# Altium PCB SD_Card_PCB.PcbDoc (part 2 of 2)
Units mil, origin at the board's own origin, x right, y up, seen from the top; angles counter-clockwise.
Board outline 5600 x 4000 mil, 4 copper layers (Top Layer, Plane(Gnd), Plane(Pwr), Bottom Layer), stack 23.756 mil thick; 198 components, 190 nets, 528 pads, 167 vias.
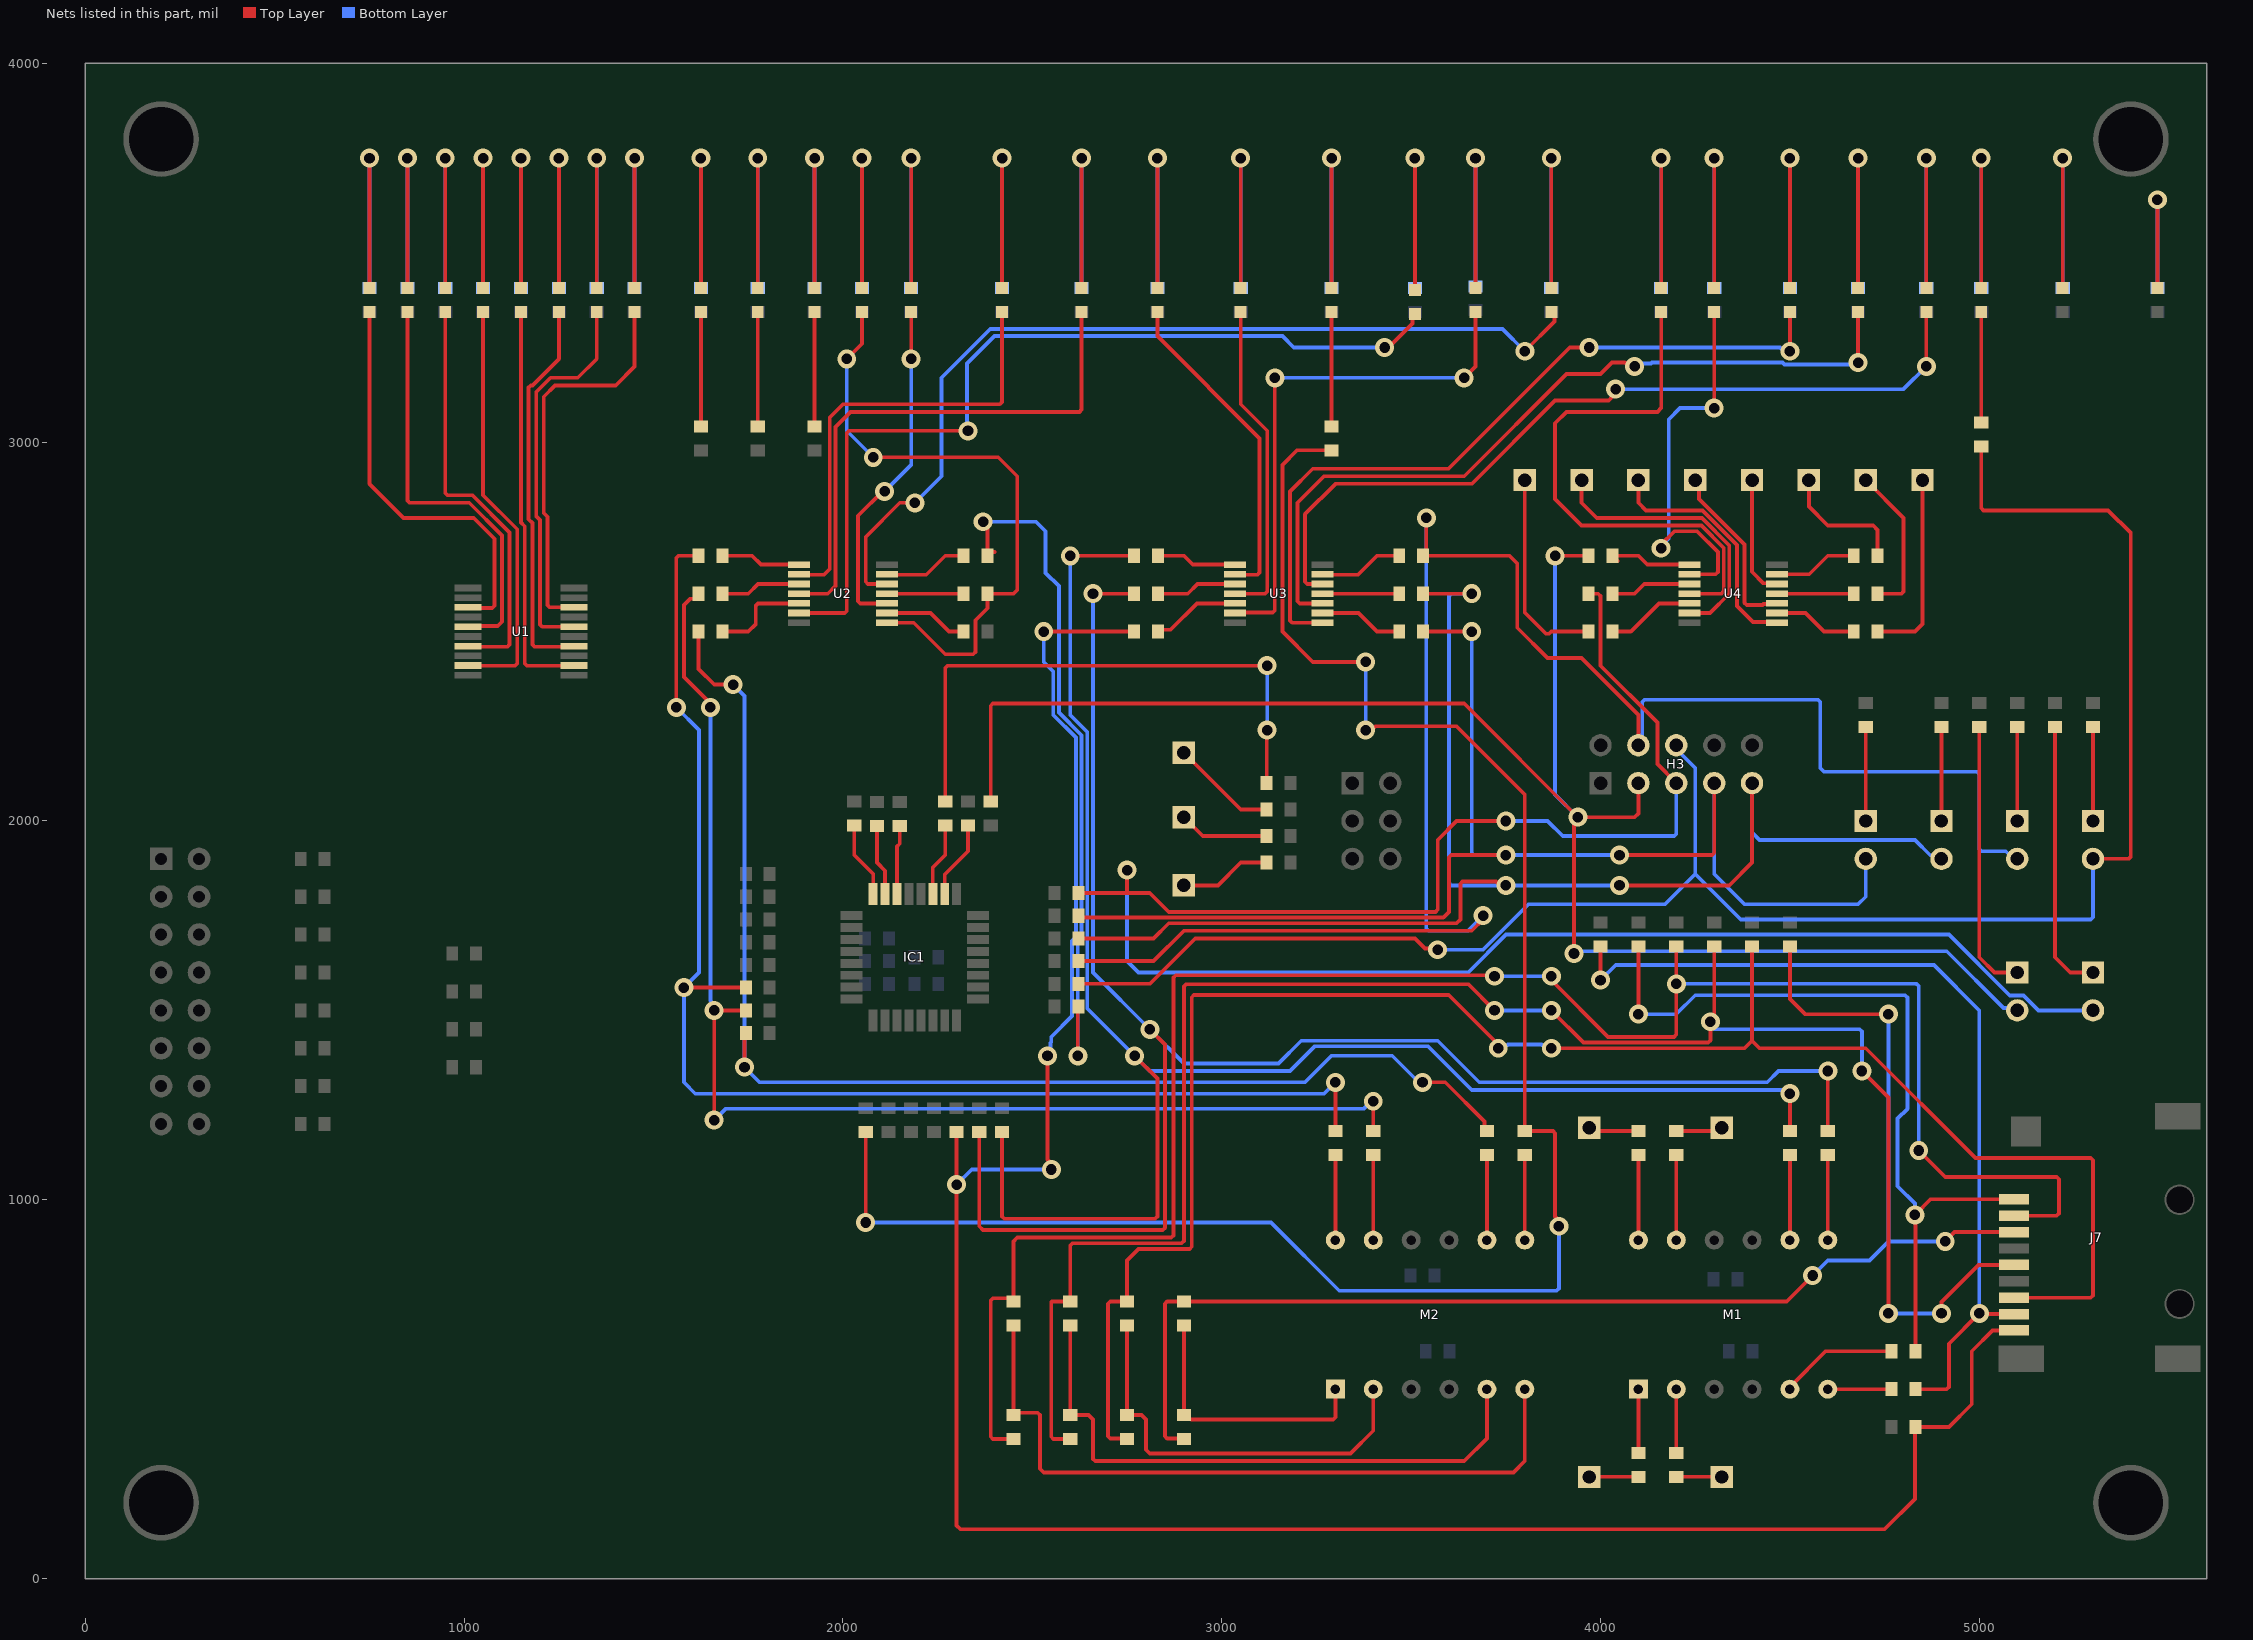
[diagram p4: the nets of this part, all layers, seen from the top]

## Via types
v1: diameter 50, hole 28, Top Layer to Bottom Layer, 167 vias

## Nets (pads, with @x,y where several pads share a name; then routed paths per layer and width w, separated by ;. In a path a pad name is that pad's centre, name@x,y a point inside that pad or via, vN(x,y) a via of type N, cw(c..) or ccw(c..) an arc to the next point about the centre after c; other vN are vias at no path point) (continued)
NetIC1_26: IC1.26 R26.1 | length 207
  Top Layer w10: IC1.26@2268.74,1806.85 2268.74,1858.74 2330,1920 R26.1@2330,1988.5
NetIC1_27: IC1.27 R24.1 | length 195.2
  Top Layer w10: IC1.27@2237.24,1806.85 2237.24,1877.24 2270,1910 R24.1@2270,1988.5
NetIC1_30: IC1.30 R23.2 | length 183.2
  Top Layer w10: IC1.30@2142.76,1806.85 2142.76,1932.76 2150,1940 R23.2@2150,1987.01
NetIC1_31: IC1.31 R25.2 | length 189
  Top Layer w10: R25.2@2090,1987.01 2090,1890 2111.26,1868.74 IC1.31@2111.26,1806.85
NetIC1_32: IC1.32 R27.2 | length 202.3
  Top Layer w10: R27.2@2030,1988.5 2030,1910 2079.76,1860.24 IC1.32@2079.76,1806.85
NetJ1_1: J1.1 R14.1 | length 725.1
  Top Layer w10: R14.1@5000,2248.5 5000,1640 5040,1600 J1.1@5100,1600
NetJ2_1: J2.1 R9.1 | length 725.1
  Top Layer w10: R9.1@5200,2248.5 5200,1640 5240,1600 J2.1@5300,1600
NetJ3_1: J3.1 R15.1 | length 248.5
  Top Layer w10: J3.1@4700,2000 R15.1@4700,2248.5
NetJ4_1: J4.1 R10.1 | length 248.5
  Top Layer w10: J4.1@4900,2000 R10.1@4900,2248.5
NetJ5_1: J5.1 R11.1 | length 248.5
  Top Layer w10: J5.1@5100,2000 R11.1@5100,2248.5
NetJ6_1: J6.1 R16.2 | length 248.5
  Top Layer w10: J6.1@5300,2000 R16.2@5300,2248.5
NetJ7_1: J7.1 R60.1 R63.2 | length 2152.3
  Top Layer w10: v1(4100,1490) R60.1@4100,1668.5 ; R63.2@4831.5,600 v1@4831.5,960 ; v1@4831.5,961.5 4871.24,1001.24 J7.1@5091.81,1001.24
  Bottom Layer w10: v1(4100,1490) 4200,1490 4250,1540 4804.14,1540 4810,1534.14 4810,1240 4784.14,1214.14 4784.14,1035.86 4830,990 v1(4830,960)
NetJ7_2: J7.2 R59.1 R72.2 R76.2 | length 5092.2
  Top Layer w10: R76.2@2450,368.5 2395.86,368.5 2390,374.36 2390,734.14 2395.86,740 2441.5,740 R72.2@2450,731.5 2450,890 2460,900 2866.86,900 2872.72,905.86 2872.72,1586.87 2878.58,1592.72 3717.28,1592.72 v1(3720,1590) ; R76.2@2450,375.86 R76.2@2455.86,370 ; v1(3870,1590) 3870,1580 4020,1430 4194.14,1430 4200,1435.86 v1(4200,1570) R59.1@4200,1668.5 ; v1(4840,1130) 4910,1060 5204.14,1060 5210,1054.14 5210,963.79 5204.14,957.93 J7.2@5091.81,957.93
  Bottom Layer w10: v1(3720,1590) v1(3870,1590) ; v1(4200,1570) 4834.14,1570 4840,1564.14 v1(4840,1130)
NetJ7_3: J7.3 R56.1 R66.2 R73.2 | length 3737.7
  Top Layer w10: R73.2@2900,368.5 2898.5,370 2855.86,370 2850,375.86 2850,725.64 2855.86,731.5 4491.5,731.5 v1(4560,800) ; R56.1@4500,1668.5 4500,1530 4540,1490 v1(4760,1490) ; v1(4910,890) 4934.62,914.62 J7.3@5091.52,914.62
  Bottom Layer w10: v1(4560,800) 4600,840 4710,840 4760,890 ; v1(4760,1490) 4760,890 ; v1(4910,890) 4760,890
NetJ7_5: J7.5 R58.1 R70.2 R75.2 | length 4918.3
  Top Layer w10: R75.2@2591.5,360 R75.2@2600,368.5 2555.86,368.5 2550,374.36 2550,730 2551.5,731.5 R70.2@2600,731.5 2600,879.14 2605.86,885 2894.14,885 2900,890.86 2900,1563.07 2905.86,1568.92 3651.07,1568.92 v1(3720,1500) ; v1(3870,1500) 3955,1415 4284.14,1415 4290,1420.86 4290,1480.82 4300,1490.82 R58.1@4300,1668.5 ; v1(4690,1340) 4760,1270 v1(4760,700) ; v1(4900,700) 4900,730 4998,828 J7.5@5091.52,828
  Bottom Layer w10: v1(3720,1500) v1(3870,1500) ; v1(4290,1470) 4290,1460 4300,1450 4684.14,1450 4690,1444.14 v1(4690,1340) ; v1@4778.49,709.16 v1(4760,700) v1(4900,700)
NetJ7_7: J7.7 R57.1 R68.2 R74.2 | length 4817.8
  Top Layer w10: R74.2@2750,368.5 2748.5,370 2705.86,370 2700,375.86 2700,725.64 2705.86,731.5 R68.2@2750,731.5 2750,840 2780,870 2914.82,870 2920.68,875.86 2920.68,1534.82 2926.54,1540.68 3599.32,1540.68 3730,1410 v1(3730,1400) ; v1(3870,1400) 4380,1400 4400,1420 ; R57.1@4400,1668.5 4400,1420 ; J7.7@5091.52,741.39 5294.14,741.39 5300,747.25 5300,1104.14 5294.14,1110 4990,1110 4700,1400 4420,1400 4400,1420
  Bottom Layer w10: v1(3730,1400) 3737.65,1407.65 3753.51,1407.65 3755.86,1410 3844.14,1410 3846.49,1407.65 3862.35,1407.65 v1(3870,1400)
NetJ7_8: J7.8 R61.1 R64.2 | length 2361.8
  Top Layer w10: v1(4000,1580) R61.1@4000,1668.5 ; R64.2@4831.5,500 4914.14,500 4920,505.86 4920,620 v1@4998.08,698.08 ; v1@5000,698.08 J7.8@5091.52,698.08
  Bottom Layer w10: v1(4000,1580) 4040,1620 4880,1620 5000,1500 v1(5000,700)
NetLED1_1: LED1.1 U2.2 | length 1196.9
  Top Layer w10: U2.2@1884.33,2651.18 1885.51,2650 1950,2650 1965,2665 1965,3065 2000,3100 2414.14,3100 2420,3105.86 LED1.1@2420,3343.5
NetLED1_2: LED1.2 R77.1 | length 687
  Top Layer w10: LED1.2@2420,3406.5 v1(2420,3750)
  Bottom Layer w10: R77.1@2420,3406.5 v1(2420,3750)
NetLED2_1: LED2.1 U2.4 | length 1450.6
  Top Layer w10: U2.4@1884.33,2600 1960,2600 1980,2620 1980,3040 2020,3080 2624.14,3080 2630,3085.86 LED2.1@2630,3343.5
NetLED2_2: LED2.2 R78.1 | length 687
  Top Layer w10: LED2.2@2630,3406.5 v1(2630,3750)
  Bottom Layer w10: R78.1@2630,3406.5 v1(2630,3750)
NetLED3_1: LED3.1 U2.6 | length 2370.9
  Top Layer w10: U2.6@1884.33,2548.82 2004.14,2548.82 2010,2554.68 2010,3024.14 2015.86,3030 v1(2330,3030) ; v1(3430,3250) 3440,3250 3503.61,3313.61 3503.61,3332.12 LED3.1@3510,3338.5
  Bottom Layer w10: v1(2330,3030) 2327.65,3032.35 2327.65,3207.65 2400,3280 3160,3280 3190,3250 v1(3430,3250)
NetLED3_2: LED3.2 R79.1 | length 692
  Top Layer w10: LED3.2@3510,3401.5 v1(3510,3750)
  Bottom Layer w10: R79.1@3510,3406.5 v1(3510,3750)
NetLED4_2: LED4.2 R80.1 | length 687
  Top Layer w10: LED4.2@2050,3406.5 v1(2050,3750)
  Bottom Layer w10: R80.1@2050,3406.5 v1(2050,3750)
NetLED5_1: LED5.1 U2.12 | length 2465.1
  Top Layer w10: U2.12@2115.67,2625.59 2065.86,2625.59 2060,2631.45 2060,2750 2150,2840 v1(2190,2840) ; v1(3800,3240) 3878.61,3318.61 3878.61,3338.61 3880,3340 3876.5,3343.5 LED5.1@3870,3343.5
  Bottom Layer w10: v1(2190,2840) 2260,2910 2260,3170 2388.7,3298.7 3741.3,3298.7 v1(3800,3240)
NetLED5_2: LED5.2 R82.1 | length 687
  Top Layer w10: LED5.2@3870,3406.5 v1(3870,3750)
  Bottom Layer w10: R82.1@3870,3406.5 v1(3870,3750)
NetLED6_1: LED6.1 U1.18 | length 1043.1
  Top Layer w10: U1.18@1289.76,2563.98 1225.86,2563.98 1220,2569.83 1220,2803.14 1210,2813.14 1210,3120 1240,3150 1400,3150 1450,3200 LED6.1@1450,3343.5
NetLED6_2: LED6.2 R85.1 | length 687
  Top Layer w10: LED6.2@1450,3406.5 v1(1450,3750)
  Bottom Layer w10: R85.1@1450,3406.5 v1(1450,3750)
NetLED7_1: LED7.1 U1.16 | length 1029.5
  Top Layer w10: U1.16@1289.76,2512.8 1205.86,2512.8 1200,2518.65 1200,2794.85 1190,2804.85 1190,3131.72 1228.28,3170 1300,3170 1350,3220 LED7.1@1350,3343.5
NetLED7_2: LED7.2 R86.1 | length 687
  Top Layer w10: LED7.2@1350,3406.5 v1(1350,3750)
  Bottom Layer w10: R86.1@1350,3406.5 v1(1350,3750)
NetLED8_1: LED8.1 U1.14 | length 1030.2
  Top Layer w10: LED8.1@1250,3343.5 1250,3220 1180,3150 1175.86,3150 1170,3144.14 1170,2796.57 1180,2786.57 1180,2465.86 1185.86,2460 1288.15,2460 U1.14@1289.76,2461.61
NetLED8_2: LED8.2 R87.1 | length 687
  Top Layer w10: LED8.2@1250,3406.5 v1(1250,3750)
  Bottom Layer w10: R87.1@1250,3406.5 v1(1250,3750)
NetLED9_1: LED9.1 U1.12 | length 1064.2
  Top Layer w10: LED9.1@1150,3343.5 1150,2788.28 1160,2778.28 1160,2415.86 1165.86,2410 1289.33,2410 U1.12@1289.76,2410.43
NetLED9_2: LED9.2 R88.1 | length 687
  Top Layer w10: LED9.2@1150,3406.5 v1(1150,3750)
  Bottom Layer w10: R88.1@1150,3406.5 v1(1150,3750)
NetLED10_1: LED10.1 U1.9 | length 1097.3
  Top Layer w10: U1.9@1010.24,2410.43 1010.67,2410 1134.14,2410 1140,2415.86 1140,2770 1050,2860 LED10.1@1050,3343.5
NetLED10_2: LED10.2 R89.1 | length 687
  Top Layer w10: LED10.2@1050,3406.5 v1(1050,3750)
  Bottom Layer w10: R89.1@1050,3406.5 v1(1050,3750)
NetLED11_1: LED11.1 U1.7 | length 1099.5
  Top Layer w10: LED11.1@950,3343.5 950,2865.86 955.86,2860 1021.72,2860 1120,2761.72 1120,2465.86 1114.14,2460 1011.85,2460 U1.7@1010.24,2461.61
NetLED11_2: LED11.2 R90.1 | length 687
  Top Layer w10: LED11.2@950,3406.5 v1(950,3750)
  Bottom Layer w10: R90.1@950,3406.5 v1(950,3750)
NetLED12_1: LED12.1 U1.5 | length 1108.7
  Top Layer w10: LED12.1@850,3343.5 850,2845.86 855.86,2840 1013.43,2840 1100,2753.43 1100,2525.86 1088.67,2514.53 1011.97,2514.53 U1.5@1010.24,2512.8
NetLED12_2: LED12.2 R91.1 | length 687
  Top Layer w10: LED12.2@850,3406.5 v1(850,3750)
  Bottom Layer w10: R91.1@850,3406.5 v1(850,3750)
NetLED13_1: LED13.1 U1.3 | length 1093.5
  Top Layer w10: LED13.1@750,3343.5 750,2890 840,2800 1025.15,2800 1080,2745.15 1080,2568.1 1074.14,2562.24 1011.97,2562.24 U1.3@1010.24,2563.98
NetLED13_2: LED13.2 R92.1 | length 687
  Top Layer w10: LED13.2@750,3406.5 v1(750,3750)
  Bottom Layer w10: R92.1@750,3406.5 v1(750,3750)
NetLED14_1: LED14.1 U2.10 | length 902.8
  Top Layer w10: v1(2110,2870) 2104.14,2870 2040,2805.86 2040,2580.27 2045.86,2574.41 U2.10@2115.67,2574.41 ; v1(2180,3220) LED14.1@2180,3343.5
  Bottom Layer w10: v1(2110,2870) 2180,2940 v1(2180,3220)
NetLED14_2: LED14.2 R81.1 | length 687
  Top Layer w10: LED14.2@2180,3406.5 v1(2180,3750)
  Bottom Layer w10: R81.1@2180,3406.5 v1(2180,3750)
NetLED15_2: LED15.2 R83.1 | length 467
  Top Layer w10: LED15.2@5470,3406.5 v1(5470,3640)
  Bottom Layer w10: R83.1@5470,3406.5 v1(5470,3640)
NetLED16_2: LED16.2 R84.2 | length 687
  Top Layer w10: LED16.2@5220,3406.5 v1(5220,3750)
  Bottom Layer w10: R84.2@5220,3406.5 v1(5220,3750)
NetLED17_1: LED17.1 R112.2 | length 302
  Top Layer w10: R112.2@1625,3041.5 LED17.1@1625,3343.5
NetLED17_2: LED17.2 R99.1 | length 687
  Top Layer w10: LED17.2@1625,3406.5 v1(1625,3750)
  Bottom Layer w10: R99.1@1625,3406.5 v1(1625,3750)
NetLED18_1: LED18.1 R115.2 | length 302
  Top Layer w10: R115.2@1775,3041.5 LED18.1@1775,3343.5
NetLED18_2: LED18.2 R100.2 | length 687
  Top Layer w10: LED18.2@1775,3406.5 v1(1775,3750)
  Bottom Layer w10: R100.2@1775,3406.5 v1(1775,3750)
NetLED19_1: LED19.1 R118.2 | length 302
  Top Layer w10: R118.2@3290,3041.5 LED19.1@3290,3343.5
NetLED19_2: LED19.2 R101.1 | length 687
  Top Layer w10: LED19.2@3290,3406.5 v1(3290,3750)
  Bottom Layer w10: R101.1@3290,3406.5 v1(3290,3750)
NetLED20_1: LED20.1 R121.2 | length 302
  Top Layer w10: R121.2@1925,3041.5 LED20.1@1925,3343.5
NetLED20_2: LED20.2 R102.1 | length 691.1
  Top Layer w10: LED20.2@1925,3406.5 1925,3745 v1@1930,3750
  Bottom Layer w10: R102.1@1925,3406.5 1925,3745 v1@1930,3750
  other v1: 1925,3750
NetLED21_1: LED21.1 R124.2 | length 292
  Top Layer w10: R124.2@5005,3051.5 LED21.1@5005,3343.5
NetLED21_2: LED21.2 R103.1 | length 691.1
  Top Layer w10: v1@5000,3750 5005,3745 LED21.2@5005,3406.5
  Bottom Layer w10: v1@5000,3750 5005,3745 R103.1@5005,3406.5
  other v1: 5005,3750
NetLED22_1: LED22.1 U3.2 | length 868.1
  Top Layer w10: LED22.1@2830,3343.5 2830,3280 3100,3010 3100,2655.86 3094.14,2650 3035.51,2650 U3.2@3034.33,2651.18
NetLED22_2: LED22.2 R104.1 | length 687
  Top Layer w10: LED22.2@2830,3406.5 v1(2830,3750)
  Bottom Layer w10: R104.1@2830,3406.5 v1(2830,3750)
NetLED23_1: LED23.1 U3.4 | length 854.7
  Top Layer w10: U3.4@3034.33,2600 3114.14,2600 3120,2605.86 3120,3030 3050,3100 LED23.1@3050,3343.5
NetLED23_2: LED23.2 R105.1 | length 687
  Top Layer w10: LED23.2@3050,3406.5 v1(3050,3750)
  Bottom Layer w10: R105.1@3050,3406.5 v1(3050,3750)
NetLED24_1: LED24.1 U3.6 | length 1408.7
  Top Layer w10: U3.6@3034.33,2548.82 3035.51,2550 3134.14,2550 3140,2555.86 v1(3140,3170) ; v1(3640,3170) 3670,3200 LED24.1@3670,3343.5
  Bottom Layer w10: v1(3140,3170) v1(3640,3170)
NetLED24_2: LED24.2 R106.1 | length 682
  Top Layer w10: LED24.2@3670,3406.5 v1(3670,3750)
  Bottom Layer w10: R106.1@3670,3411.5 v1(3670,3750)
NetLED25_1: LED25.1 U3.8 | length 2014.1
  Top Layer w10: U3.8@3265.67,2523.23 3185.86,2523.23 3180,2529.09 3180,2870 3240,2930 3598.79,2930 3918.79,3250 v1(3970,3250) ; v1(4500,3240) LED25.1@4500,3343.5
  Bottom Layer w10: v1(3970,3250) 4474.14,3250 4476.49,3247.65 4492.35,3247.65 v1(4500,3240)
NetLED25_2: LED25.2 R107.1 | length 687
  Top Layer w10: LED25.2@4500,3406.5 v1(4500,3750)
  Bottom Layer w10: R107.1@4500,3406.5 v1(4500,3750)
NetLED26_1: LED26.1 U3.10 | length 2104.9
  Top Layer w10: U3.10@3265.67,2574.41 3205.86,2574.41 3200,2580.27 3200,2840 3270,2910 3640,2910 3910,3180 4000,3180 4030,3210 4064.14,3210 4066.49,3207.65 4082.35,3207.65 v1(4090,3200) ; v1(4680,3210) LED26.1@4680,3343.5
  Bottom Layer w10: v1(4090,3200) 4097.65,3207.65 4133.51,3207.65 4135.86,3210 4480.5,3210 4485.5,3205 v1@4680,3205
NetLED26_2: LED26.2 R108.1 | length 687
  Top Layer w10: LED26.2@4680,3406.5 v1(4680,3750)
  Bottom Layer w10: R108.1@4680,3406.5 v1(4680,3750)
NetLED27_1: LED27.1 U3.12 | length 2178.6
  Top Layer w10: U3.12@3265.67,2625.59 3225.86,2625.59 3220,2631.45 3220,2810 3300,2890 3660,2890 3880,3110 4021.72,3110 4027.57,3115.86 4027.57,3116.75 4040,3129.18 v1(4040,3140) ; v1(4860,3200) LED27.1@4860,3343.5
  Bottom Layer w10: v1(4040,3140) 4800,3140 v1(4860,3200)
NetLED27_2: LED27.2 R109.1 | length 687
  Top Layer w10: LED27.2@4860,3406.5 v1(4860,3750)
  Bottom Layer w10: R109.1@4860,3406.5 v1(4860,3750)
NetLED28_1: LED28.1 U4.2 | length 1062.6
  Top Layer w10: v1(4160,2720) 4160,2730 4195,2765 4255,2765 4310,2710 4310,2657.04 4304.14,2651.18 U4.2@4234.33,2651.18 ; v1(4300,3090) LED28.1@4300,3343.5
  Bottom Layer w10: v1(4160,2720) 4160,2725.86 4180,2745.86 4180,3060 4210,3090 v1(4300,3090)
NetLED28_2: LED28.2 R110.1 | length 687
  Top Layer w10: LED28.2@4300,3406.5 v1(4300,3750)
  Bottom Layer w10: R110.1@4300,3406.5 v1(4300,3750)
NetLED29_1: LED29.1 U4.4 | length 1457
  Top Layer w10: LED29.1@4160,3343.5 4160,3090 4150,3080 3910,3080 3880,3050 3880,2850 3950,2780 4266.36,2780 4325,2721.36 4325,2605.86 4319.14,2600 U4.4@4234.33,2600
NetLED29_2: LED29.2 R111.1 | length 687
  Top Layer w10: LED29.2@4160,3406.5 v1(4160,3750)
  Bottom Layer w10: R111.1@4160,3406.5 v1(4160,3750)
NetM1_1: M1.1 R51.1 | length 168.5
  Top Layer w10: R51.1@4100,331.5 M1.1@4100,500
NetM1_2: M1.2 R53.1 | length 168.5
  Top Layer w10: R53.1@4200,331.5 M1.2@4200,500
NetM1_5: M1.5 R63.1 | length 313.4
  Top Layer w10: M1.5@4500,500 4500,505.86 4594.14,600 R63.1@4768.5,600
NetM1_6: M1.6 R64.1 | length 168.5
  Top Layer w10: M1.6@4600,500 R64.1@4768.5,500
NetM1_7: M1.7 R55.2 | length 224.8
  Top Layer w10: M1.7@4600,893.7 R55.2@4600,1118.5
NetM1_8: M1.8 R54.2 | length 224.8
  Top Layer w10: M1.8@4500,893.7 R54.2@4500,1118.5
NetM1_11: M1.11 R52.2 | length 224.8
  Top Layer w10: M1.11@4200,893.7 R52.2@4200,1118.5
NetM1_12: M1.12 R50.2 | length 224.8
  Top Layer w10: M1.12@4100,893.7 R50.2@4100,1118.5
NetM2_1: M2.1 R66.1 R73.1 | length 718.3
  Top Layer w10: R66.1@2900,668.5 R73.1@2900,431.5 2910.75,420.75 2918.81,420.75 2919.56,420 3294.14,420 3300,425.86 M2.1@3300,500
NetM2_2: M2.2 R68.1 R74.1 | length 1110.8
  Top Layer w10: R68.1@2750,668.5 R74.1@2750,431.5 2788.5,431.5 2800,420 2800,340 2810,330 3340,330 3400,390 M2.2@3400,500
NetM2_5: M2.5 R70.1 R75.1 | length 1603.2
  Top Layer w10: R70.1@2600,668.5 R75.1@2600,431.5 2648.5,431.5 2660,420 2660,315.86 2665.86,310 3640,310 3700,370 M2.5@3700,500
NetM2_6: M2.6 R72.1 R76.1 | length 1940.7
  Top Layer w10: R72.1@2450,668.5 R76.1@2450,431.5 2456.37,437.87 2514.14,437.87 2520,432.01 2520,290 2530,280 3770,280 3800,310 M2.6@3800,500
NetM2_7: M2.7 R71.2 | length 218.5
  Top Layer w10: M2.7@3800,900 R71.2@3800,1118.5
NetM2_8: M2.8 R69.2 | length 218.5
  Top Layer w10: M2.8@3700,900 R69.2@3700,1118.5
NetM2_11: M2.11 R67.2 | length 218.5
  Top Layer w10: M2.11@3400,900 R67.2@3400,1118.5
NetM2_12: M2.12 R65.2 | length 224.8
  Top Layer w10: M2.12@3300,893.7 R65.2@3300,1118.5
NetR2_1: R2.1 TP1.1 | length 280.6
  Top Layer w10: TP1.1@2900,2180 3050,2030 R2.1@3118.5,2030
NetR3_2: R3.2 TP2.1 | length 243.4
  Top Layer w10: TP2.1@2900,1830 2990,1830 3050,1890 R3.2@3118.5,1890
NetR5_1: R5.1 TP3.1 | length 239.2
  Top Layer w10: TP3.1@2900,2010 2950,1960 R5.1@3118.5,1960
NetR50_1: R50.1 TP4.1 | length 133.5
  Top Layer w10: TP4.1@3970,1190 3978.5,1181.5 R50.1@4100,1181.5
NetR51_2: R51.2 TP5.1 | length 130.2
  Top Layer w10: TP5.1@3970,268 3970.5,268.5 R51.2@4100,268.5
NetR52_1: R52.1 TP6.1 | length 123.5
  Top Layer w10: R52.1@4200,1181.5 4311.5,1181.5 TP6.1@4320,1190
NetR53_2: R53.2 TP7.1 | length 120.2
  Top Layer w10: R53.2@4200,268.5 4319.5,268.5 TP7.1@4320,268
NetR93_2: R93.2 U2.1 | length 212.5
  Top Layer w10: R93.2@1681.5,2700 1760,2700 1783.23,2676.77 U2.1@1884.33,2676.77
NetR94_2: R94.2 U2.3 | length 213.4
  Top Layer w10: R94.2@1681.5,2600 1750,2600 1775.59,2625.59 U2.3@1884.33,2625.59
NetR95_2: R95.2 U2.5 | length 262.1
  Top Layer w10: R95.2@1681.5,2500 1750,2500 1770,2520 1770,2568.55 1775.86,2574.41 U2.5@1884.33,2574.41
NetR96_2: R96.2 U2.9 | length 223.1
  Top Layer w10: U2.9@2115.67,2548.82 2231.18,2548.82 2240,2540 2280,2500 R96.2@2318.5,2500
NetR97_2: R97.2 U2.11 | length 202.8
  Top Layer w10: U2.11@2115.67,2600 R97.2@2318.5,2600
NetR98_2: R98.2 U2.13 | length 224
  Top Layer w10: U2.13@2115.67,2651.18 2116.85,2650 2220,2650 2270,2700 R98.2@2318.5,2700
NetR113_2: R113.2 U3.1 | length 212.5
  Top Layer w10: R113.2@2831.5,2700 2900,2700 2923.23,2676.77 U3.1@3034.33,2676.77
NetR114_2: R114.2 U4.1 | length 233.6
  Top Layer w10: R114.2@4045.2,2686.3 4042.24,2686.3 4031.5,2697.05 R114.2@4031.5,2700 4100,2700 4123.23,2676.77 U4.1@4234.33,2676.77
NetR116_2: R116.2 U3.3 | length 213.4
  Top Layer w10: R116.2@2831.5,2600 2910,2600 2935.59,2625.59 U3.3@3034.33,2625.59
NetR117_2: R117.2 U4.3 | length 213.4
  Top Layer w10: R117.2@4031.5,2600 4090,2600 4115.59,2625.59 U4.3@4234.33,2625.59
NetR119_2: R119.2 U3.5 | length 233.7
  Top Layer w10: R119.2@2831.5,2500 2836.43,2504.94 2864.94,2504.94 2934.41,2574.41 U3.5@3034.33,2574.41
NetR120_1: R120.1 TP8.1 | length 544.1
  Top Layer w10: TP8.1@3800,2900 3800,2550 3855.86,2494.14 3864.14,2494.14 3870,2500 R120.1@3968.5,2500
NetR120_2: R120.2 U4.5 | length 233.7
  Top Layer w10: R120.2@4031.5,2500 4080,2500 4154.41,2574.41 U4.5@4234.33,2574.41
NetR122_2: R122.2 U3.9 | length 223.1
  Top Layer w10: U3.9@3265.67,2548.82 3361.18,2548.82 3410,2500 R122.2@3468.5,2500
NetR123_1: R123.1 TP10.1 | length 506.8
  Top Layer w10: R123.1@4731.5,2500 4830,2500 4850,2520 TP10.1@4850,2900
NetR123_2: R123.2 U4.9 | length 223.1
  Top Layer w10: U4.9@4465.67,2548.82 4541.18,2548.82 4590,2500 R123.2@4668.5,2500
NetR125_2: R125.2 U3.11 | length 202.8
  Top Layer w10: U3.11@3265.67,2600 R125.2@3468.5,2600
NetR126_1: R126.1 TP12.1 | length 406.5
  Top Layer w10: TP12.1@4700,2900 4800,2800 4800,2605.86 4794.14,2600 R126.1@4731.5,2600
NetR126_2: R126.2 U4.11 | length 202.8
  Top Layer w10: U4.11@4465.67,2600 R126.2@4668.5,2600
NetR127_2: R127.2 U3.13 | length 224
  Top Layer w10: U3.13@3265.67,2651.18 3266.85,2650 3360,2650 3410,2700 R127.2@3468.5,2700
NetR128_1: R128.1 TP14.1 | length 345.5
  Top Layer w10: TP14.1@4550,2900 4550,2830 4600,2780 4720,2780 4731.5,2768.5 R128.1@4731.5,2700
NetR128_2: R128.2 U4.13 | length 223.1
  Top Layer w10: U4.13@4465.67,2651.18 4551.18,2651.18 4600,2700 R128.2@4668.5,2700
NetTP9_1: TP9.1 U4.6 | length 751.2
  Top Layer w10: TP9.1@3950,2900 3950,2840 3990,2800 4267.57,2800 4340,2727.57 4340,2599.64 4289.17,2548.82 U4.6@4234.33,2548.82
NetTP11_1: TP11.1 U4.8 | length 651.3
  Top Layer w10: TP11.1@4100,2900 4100,2840 4120,2820 4268.79,2820 4360,2728.79 4360,2567.57 4402.61,2524.96 4463.94,2524.96 U4.8@4465.67,2523.23
NetTP13_1: TP13.1 U4.10 | length 467.9
  Top Layer w10: TP13.1@4250,2900 4260,2890 4260,2850 4380,2730 4380,2575.86 4385.86,2570 4427.74,2570 4430.42,2572.68 4463.94,2572.68 U4.10@4465.67,2574.41
NetTP15_1: TP15.1 U4.12 | length 321.2
  Top Layer w10: TP15.1@4400,2900 4400,2657.74 4430.42,2627.32 4463.94,2627.32 U4.12@4465.67,2625.59
pCLK_SCLK: R44.1 R69.1 R95.1 | length 3419.7
  Top Layer w10: R95.1@1618.5,2500 1618.5,2401.5 1660,2360 v1(1710,2360) ; v1(1740,1350) 1740,1436.5 R44.1@1743.5,1440 ; v1(3530,1310) 3590,1310 3693.61,1206.39 3693.61,1187.88 R69.1@3700,1181.5
  Bottom Layer w10: v1(1710,2360) 1740,2330 v1(1740,1350) 1780,1310 3220,1310 3290,1380 3450,1380 3520,1310 v1(3530,1310)
pCMD_MOSI: R40.1 R65.1 R93.1 | length 3523.4
  Top Layer w10: v1(1560,2300) 1560,2694.14 1565.86,2700 R93.1@1618.5,2700 ; v1(1580,1560) R40.1@1743.5,1560 ; R65.1@3300,1181.5 v1(3300,1310)
  Bottom Layer w10: v1(1560,2300) 1620,2240 1620,1600 v1(1580,1560) 1580,1310 1610,1280 3270,1280 v1(3300,1310)
pDAT0_MISO: R42.1 R67.1 R94.1 | length 3368.4
  Top Layer w10: R94.1@1618.5,2600 1618.5,2597.17 1607.76,2586.42 1596.42,2586.42 1580,2570 1580,2380 1650,2310 v1(1650,2300) ; v1(1660,1210) v1(1660,1500) R42.1@1743.5,1500 ; R67.1@3400,1181.5 v1(3400,1260)
  Bottom Layer w10: v1(1650,2300) 1650,1525.86 1652.35,1523.51 1652.35,1507.65 v1(1660,1500) ; v1(1660,1210) 1690,1240 3374.14,1240 3394.14,1260 v1(3400,1260)
pDAT3_CS: R46.1 R71.1 R118.1 | length 5048.1
  Top Layer w10: v1(2060,940) R46.1@2060,1178.5 ; R118.1@3290,2978.5 3198.5,2978.5 3160,2940 3160,2500 3240,2420 v1(3380,2420) ; v1(3380,2240) 3387.65,2247.65 3403.51,2247.65 3405.86,2250 3620,2250 3800,2070 R71.1@3800,1181.5 3874.14,1181.5 3880,1175.64 3880,955.86 3882.35,953.51 3882.35,937.65 v1(3890,930)
  Bottom Layer w10: v1(2060,940) 3130,940 3310,760 3884.14,760 3890,765.86 v1(3890,930) ; v1(3380,2240) v1(3380,2420)
PI_I2C_SDA: H3.5 J2.2 R30.2 R117.1 | length 5557.2
  Top Layer w10: R30.2@2621.5,1810 2750,1810 ; v1(2750,1870) 2750,1810 ; v1(3750,2000) 3620,2000 3570,1950 3570,1765.86 3564.14,1760 2860,1760 2810,1810 2750,1810 ; R117.1@3968.5,2600 3994.14,2600 4000,2594.14 4000,2410 4150,2260 4150,2150 H3.5@4200,2100
  Bottom Layer w10: v1(2750,1870) 2750,1630 2780,1600 3650.71,1600 3750.71,1700 4920,1700 5080.47,1539.53 5116.37,1539.53 5155.9,1500 J2.2@5300,1500 ; v1(3750,2000) 3860,2000 3900,1960 4194.14,1960 4200,1965.86 H3.5@4200,2100
PI_I2C_SDC: H3.3 J1.2 R28.2 R114.1 | length 4568
  Top Layer w10: R28.2@2390,2051.5 2390,2304.14 2395.86,2310 3640,2310 v1(3940,2010) ; v1@3890,2700 R114.1@3968.5,2700 ; v1(3930,1650) 3930,1989.18 3940,1999.18 v1(3940,2010) ; H3.3@4100,2100 4100,2020 4090,2010 v1(3940,2010)
  Bottom Layer w10: v1(3880,2700) 3880,2070 v1(3940,2010) ; v1(3930,1650) 3935.86,1655.86 4914.14,1655.86 5063.51,1506.49 5093.51,1506.49 J1.2@5100,1500
PI_SPI_CS: H3.6 J6.2 R38.2 R124.1 | length 4932
  Top Layer w10: R38.2@2621.5,1570 2810,1570 2930,1690 3510,1690 3536.72,1663.28 3566.72,1663.28 v1(3570,1660) ; R124.1@5005,2988.5 5005,2825.86 5010.86,2820 5340,2820 5400,2760 5400,1905.86 5394.14,1900 J6.2@5300,1900
  Bottom Layer w10: v1(3570,1660) 3689.5,1660 3809.5,1780 4170,1780 4250,1860 ; H3.6@4200,2200 4200,2190 4250,2140 4250,1860 ; J6.2@5300,1900 5300,1745.86 5294.14,1740 4370,1740 4250,1860
PI_SPI_MISO: H3.9 J4.2 R34.2 R125.1 | length 3895.4
  Top Layer w10: R34.2@2621.5,1690 2820,1690 2860,1730 3620,1730 3630,1740 3630,1834.14 3635.86,1840 3724.14,1840 3726.49,1837.65 3742.35,1837.65 v1(3750,1830) ; R125.1@3531.5,2600 v1(3660,2600) ; v1(4050,1830) 4340,1830 4400,1890 H3.9@4400,2100
  Bottom Layer w10: v1(3660,2600) 3605.86,2600 3600,2594.14 3600,1835.86 3605.86,1830 v1(4050,1830) ; H3.9@4400,2100 4400,1970 4420,1950 4830,1950 4870.61,1909.39 4890.61,1909.39 J4.2@4900,1900
PI_SPI_MOSI: H3.7 J3.2 R32.2 R122.1 | length 3606.4
  Top Layer w10: R32.2@2621.5,1750 2626.5,1745 3585,1745 3600,1760 3600,1904.14 3605.86,1910 v1(3750,1910) ; R122.1@3531.5,2500 v1(3660,2500) ; v1(4050,1910) 4294.14,1910 4300,1915.86 H3.7@4300,2100
  Bottom Layer w10: v1(3660,2500) 3660,1915.86 3665.86,1910 v1(4050,1910) ; H3.7@4300,2100 4300,1860 4380,1780 4680,1780 4700,1800 J3.2@4700,1900
PI_SPI_SCLK: H3.4 J5.2 R36.2 R127.1 | length 4905.6
  Top Layer w10: R36.2@2621.5,1630 2820,1630 2900,1710 3660,1710 3690,1740 v1(3690,1750) ; v1(3540,2800) 3540,2708.5 R127.1@3531.5,2700 3760,2700 3780,2680 3780,2510 3860,2430 3950,2430 4100,2280 H3.4@4100,2200
  Bottom Layer w10: v1(3540,2800) 3540,1715.86 3545.86,1710 3650,1710 v1(3690,1750) ; H3.4@4100,2200 4109.39,2209.39 4109.39,2229.77 4110,2230.39 4110,2314.14 4115.86,2320 4574.14,2320 4580,2314.14 4580,2140 4590,2130 4994.14,2130 5000,2124.14 5000,1925.86 5005.86,1920 5069.61,1920 5089.61,1900 J5.2@5100,1900
pSD_DAT1: R41.2 R54.1 R113.1 | length 4569.2
  Top Layer w10: R41.2@2420,1178.5 2420,955.86 2425.86,950 2824.14,950 2830,955.86 2830,1320 v1(2770,1380) ; v1(2600,2700) R113.1@2768.5,2700 ; R54.1@4500,1181.5 v1(4500,1280)
  Bottom Layer w10: v1(2600,2700) 2600,2280 2645,2235 2645,1505 v1(2770,1380) 2810,1340 3180,1340 3245,1405 3545,1405 3660,1290 4490,1290 v1(4500,1280)
pSD_DAT2: R43.2 R55.1 R116.1 | length 4675
  Top Layer w10: R43.2@2360,1178.5 2360,930 2370,920 2844.14,920 2850,925.86 2850,1410 v1(2810,1450) ; v1(2660,2600) R116.1@2768.5,2600 ; R55.1@4600,1181.5 v1(4600,1340)
  Bottom Layer w10: v1(2660,2600) 2660,1600 v1(2810,1450) 2900,1360 3150,1360 3210,1420 3570,1420 3680,1310 4440,1310 4470,1340 v1(4600,1340)
pSD_LED: R39.2 R98.1 | length 1855.2
  Top Layer w10: v1(2370,2790) 2375.64,2790 2381.5,2784.14 R98.1@2381.5,2700 2391.5,2710 2400,2710 ; v1(2620,1380) 2620,1508.5 R39.2@2621.5,1510
  Bottom Layer w10: v1(2370,2790) 2510,2790 2535,2765 2535,2655 2570,2620 2570,2286.21 2630,2226.21 2630,1687.57 2620,1677.57 v1(2620,1380)
Read_Inverted: LED4.1 R97.1 U2.8 | length 1650.8
  Top Layer w10: v1(2010,3220) 2050,3260 LED4.1@2050,3343.5 ; v1(2080,2960) 2410,2960 2460,2910 2460,2610 2450,2600 R97.1@2381.5,2600 2381.5,2561.5 2350,2530 2350,2445.86 2344.14,2440 2270,2440 2186.77,2523.23 U2.8@2115.67,2523.23
  Bottom Layer w10: v1(2010,3220) 2010,3030 v1(2080,2960)
SD_Card_Detect: J7.9 R45.2 R62.1 R119.1 | length 6239.5
  Top Layer w10: R45.2@2300,1178.5 v1(2300,1040) 2300,140 2310,130 4750,130 4830,210 4830,398.5 R62.1@4831.5,400 4920,400 4980,460 4980,600 5035,655 J7.9@5091.52,655 ; v1(2530,2500) R119.1@2768.5,2500 ; v1@2540,1390 2540,1105.86 2542.35,1103.51 2542.35,1087.65 v1(2550,1080)
  Bottom Layer w10: v1(2300,1040) 2340,1080 v1(2550,1080) ; v1(2530,2500) 2530,2420 2555,2395 2555,2280 2615,2220 2615,1693.79 2605,1683.79 2605,1485 2550,1430 2550,1415.86 2547.65,1413.51 2547.65,1397.65 v1@2540,1390
  other v1: 2540,1380
UPDI: R1.1 R24.2 | length 1515.7
  Top Layer w10: R24.2@2270,2051.5 2270,2404.14 2275.86,2410 v1(3120,2410) ; R1.1@3118.5,2100 3118.5,2238.5 v1(3120,2240)
  Bottom Layer w10: v1(3120,2240) v1(3120,2410)
pads on no net: J7.H1 J7.H2

## Polygon pours and split planes (outlines as drawn)
no net on Bottom Layer "NONET_L04_P001" (solid, pour order 1): 0,4000 0,0 5600,0 5600,4000
no net on Top Layer "NONET_L01_P000" (solid, pour order 0): 5600,4000 5600,0 0,0 0,4000
+5 on Plane(Pwr) (split plane): 5579.9,20.1 20.1,20.1 20.1,3979.9 5579.9,3979.9
GND on Plane(Gnd) (split plane): 5579.9,20.1 20.1,20.1 20.1,3979.9 5579.9,3979.9

## Silkscreen, mask and mechanical layers (free items; w line width, h text height)
Top Overlay:
  lines w10: 705,3480 1515,3480 1515,3580 705,3580 705,3480 ; 705.5,3595 2270.5,3595 2270.5,3695 705.5,3695 705.5,3595 ; 1530,3480 2272,3480 2272,3580 1530,3580 1530,3480 ; 2287.5,3595 4040,3595 4040,3695 2287.5,3695 2287.5,3595 ; 2288.5,3480 4038.5,3480 4038.5,3580 2288.5,3580 2288.5,3480 ; 4055,3480 5085,3480 5085,3580 4055,3580 4055,3480 ; 4055,3595 5085,3595 5085,3695 4055,3695 4055,3595 ; 5097.5,3480 5532.5,3480 5532.5,3580 5097.5,3580 5097.5,3480
  text "ABS Data Systems, Inc, (c) Copyright 2023" at 1410,3823.33 h40
  text "Raspberry Pi Interface" at 4150,3803.33 h40
  text "SPI" at 4590,3630 h40
  text "Power" at 5220,3630 h40
  text "CPU Bus and Control" at 1140,3628 h40
  text "SD Card Control" at 2850,3620 h40
  text "I2C" at 4170,3620 h40
  text "Int" at 1585,3512 h40
  text "Rst" at 1725,3512 h40
  text "CS" at 1885,3512 h40
  text "RD" at 2020,3512 h40
  text "WR" at 2150,3512 h40
  text "3.3V" at 5165,3511.5 h40
  text "5V" at 5425.78,3511.5 h40
  text "MOSI" at 2350,3510 h40
  text "MISO" at 2553.9,3510 h40
  text "DAT1" at 2764.46,3510 h40
  text "DAT2" at 2968.36,3510 h40
  text "DAT3CS" at 3185.59,3510 h40
  text "CLK" at 3461.48,3510 h40
  text "Det" at 3617.4,3510 h40
  text "Access" at 3760,3510 h40
  text "SDC" at 4090,3510 h40
  text "SDA" at 4236.01,3510 h40
  text "MOSI" at 4432.01,3510 h40
  text "MISO" at 4604.68,3510 h40
  text "SCLK" at 4784.01,3510 h40
  text "CS" at 4970,3510 h40
  text "D7" at 725,3500 h40
  text "D6" at 826.9,3500 h40
  text "D5" at 928.81,3500 h40
  text "D4" at 1030.71,3500 h40
  text "D3" at 1132.62,3500 h40
  text "D2" at 1234.52,3500 h40
  text "D1" at 1336.42,3500 h40
  text "D0" at 1425,3500 h40
  text "SPI" at 5380,1940 h60
  text "I2C" at 5380,1550 h60
  text "Install for SD Mode" at 2360,810 h40
  text "P/N SDCARD-32958" at 670,190 h40
  text "Install for SPI Mode" at 2350,160 h40
Mechanical 1:
  the board outline again, w10

## Text inside footprints (layer, text, board x,y; h text height)
H1: Top Overlay "1" at 3325,2180 h40 r270; Top Overlay "2" at 3425,2200 h40 r270; Top Overlay "5" at 3325,1830 h40 r270; Top Overlay "6" at 3425,1830 h40 r270
H3: Top Overlay "2" at 3900,2180 h40; Top Overlay "1" at 3900,2080 h40; Top Overlay "9" at 4475,2090 h40; Top Overlay "10" at 4475,2190 h40
J1: Top Overlay "1" at 4990,1580 h40; Top Overlay "2" at 4980,1480 h40
J2: Top Overlay "1" at 5200,1580 h40; Top Overlay "2" at 5190,1480 h40
J3: Top Overlay "1" at 4600,1990 h40; Top Overlay "2" at 4600,1890 h40
J4: Top Overlay "1" at 4800,1990 h40; Top Overlay "2" at 4790,1890 h40
J5: Top Overlay "1" at 4990,1990 h40; Top Overlay "2" at 4980,1890 h40
J6: Top Overlay "1" at 5190,1990 h40; Top Overlay "2" at 5190,1890 h40